# EAGLE board main_board2 (EAGLE 9.2.2)
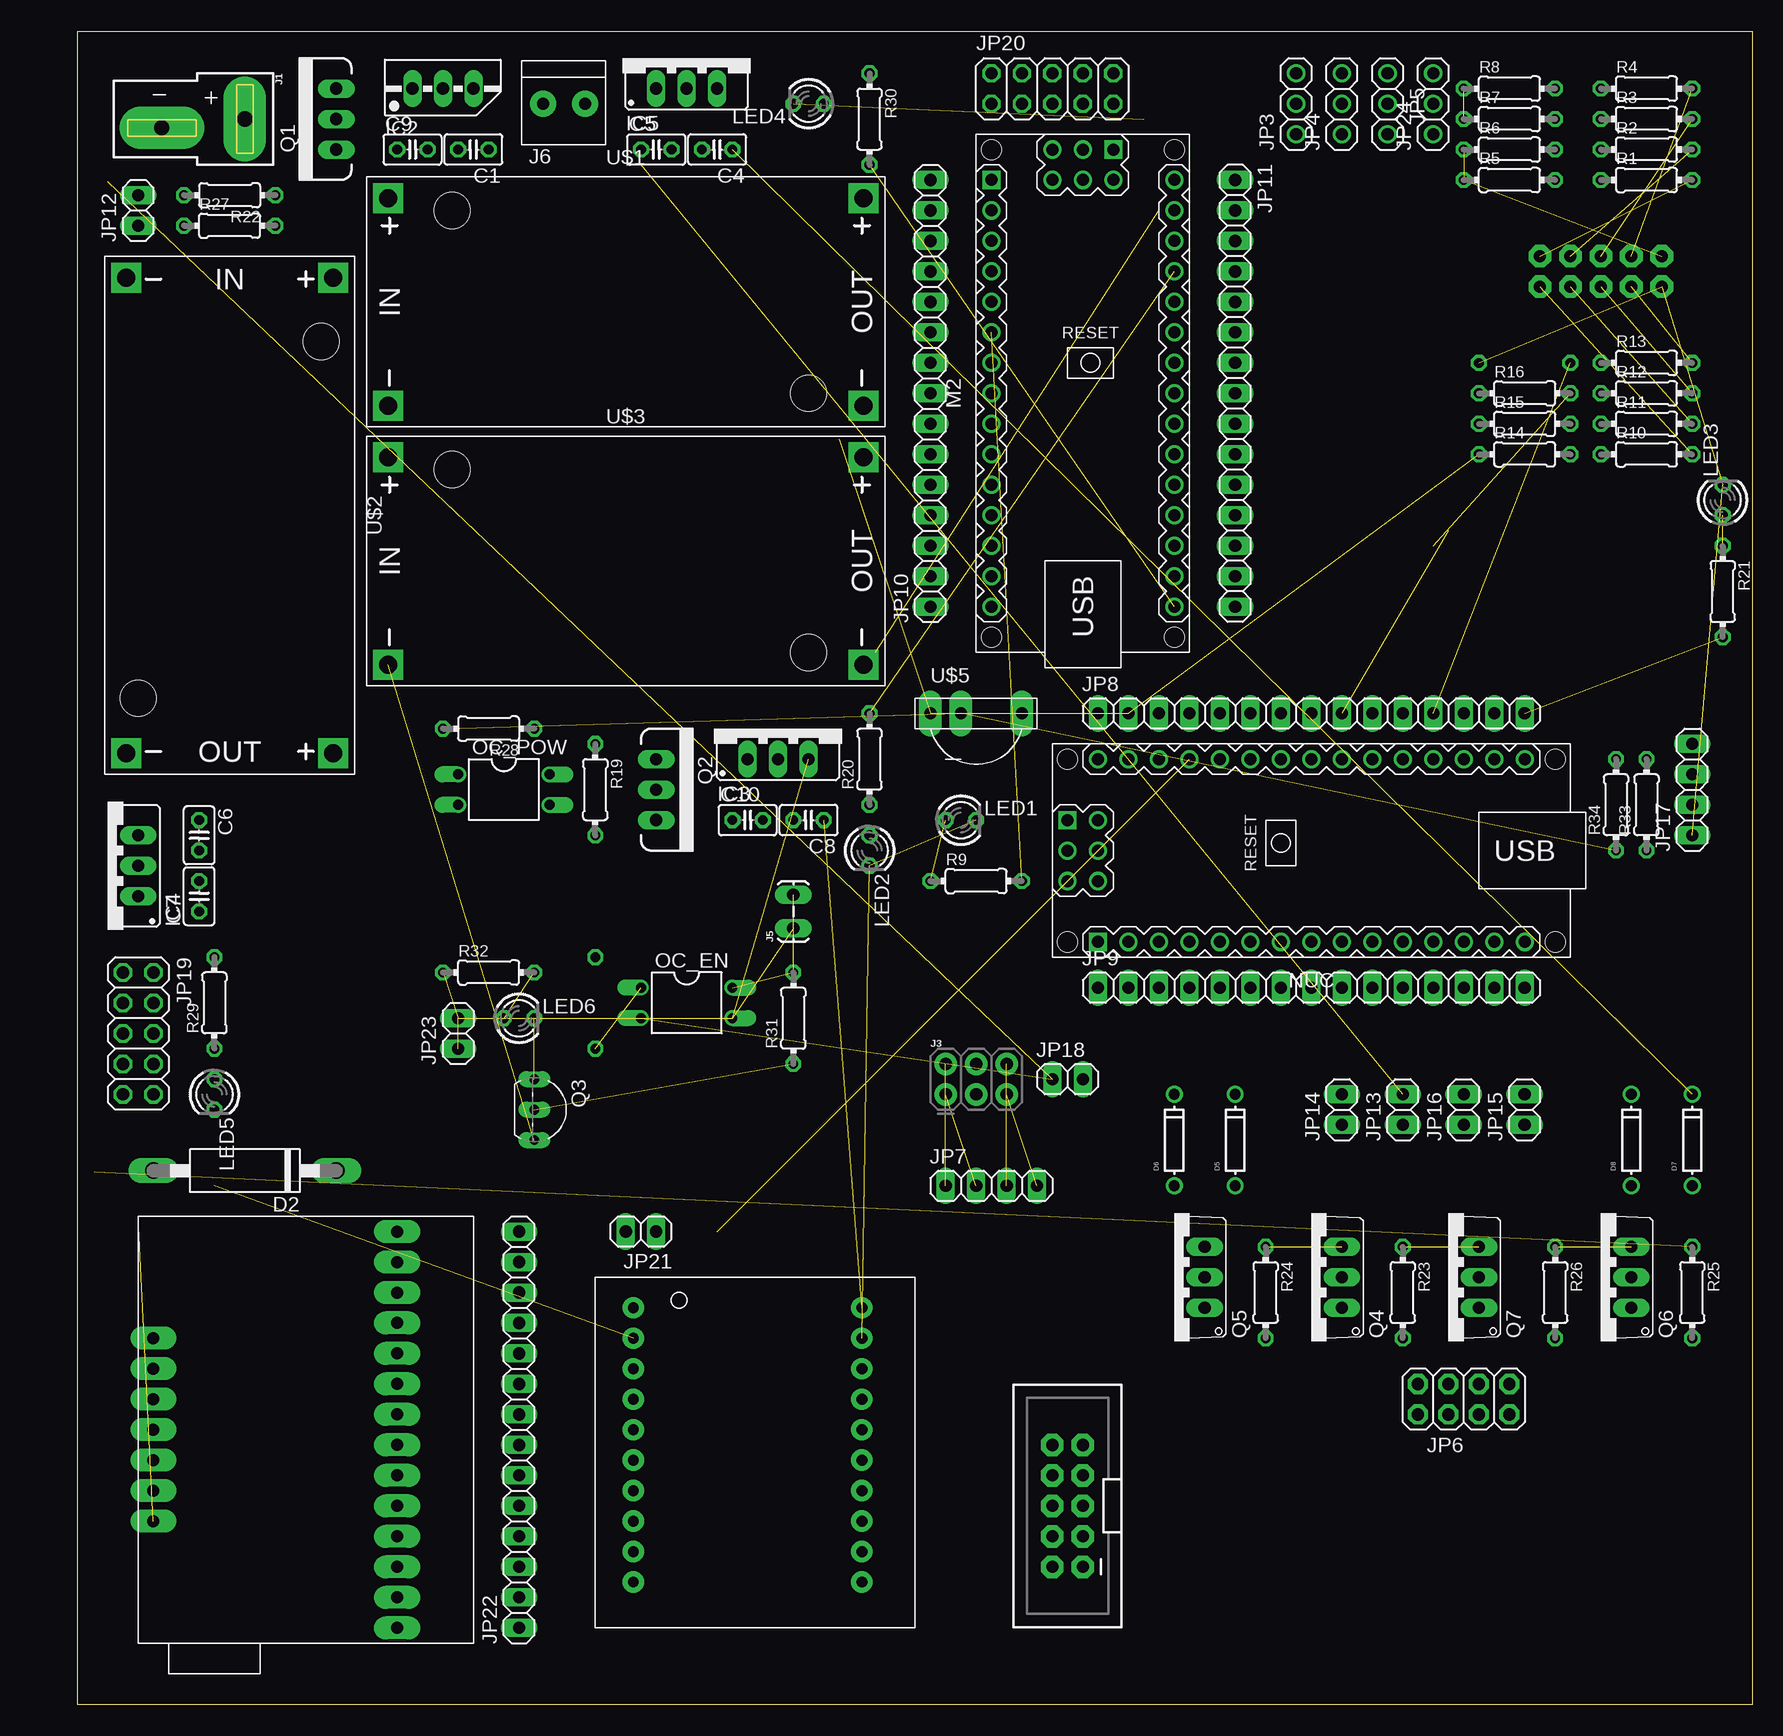
[diagram p0: board, top side]
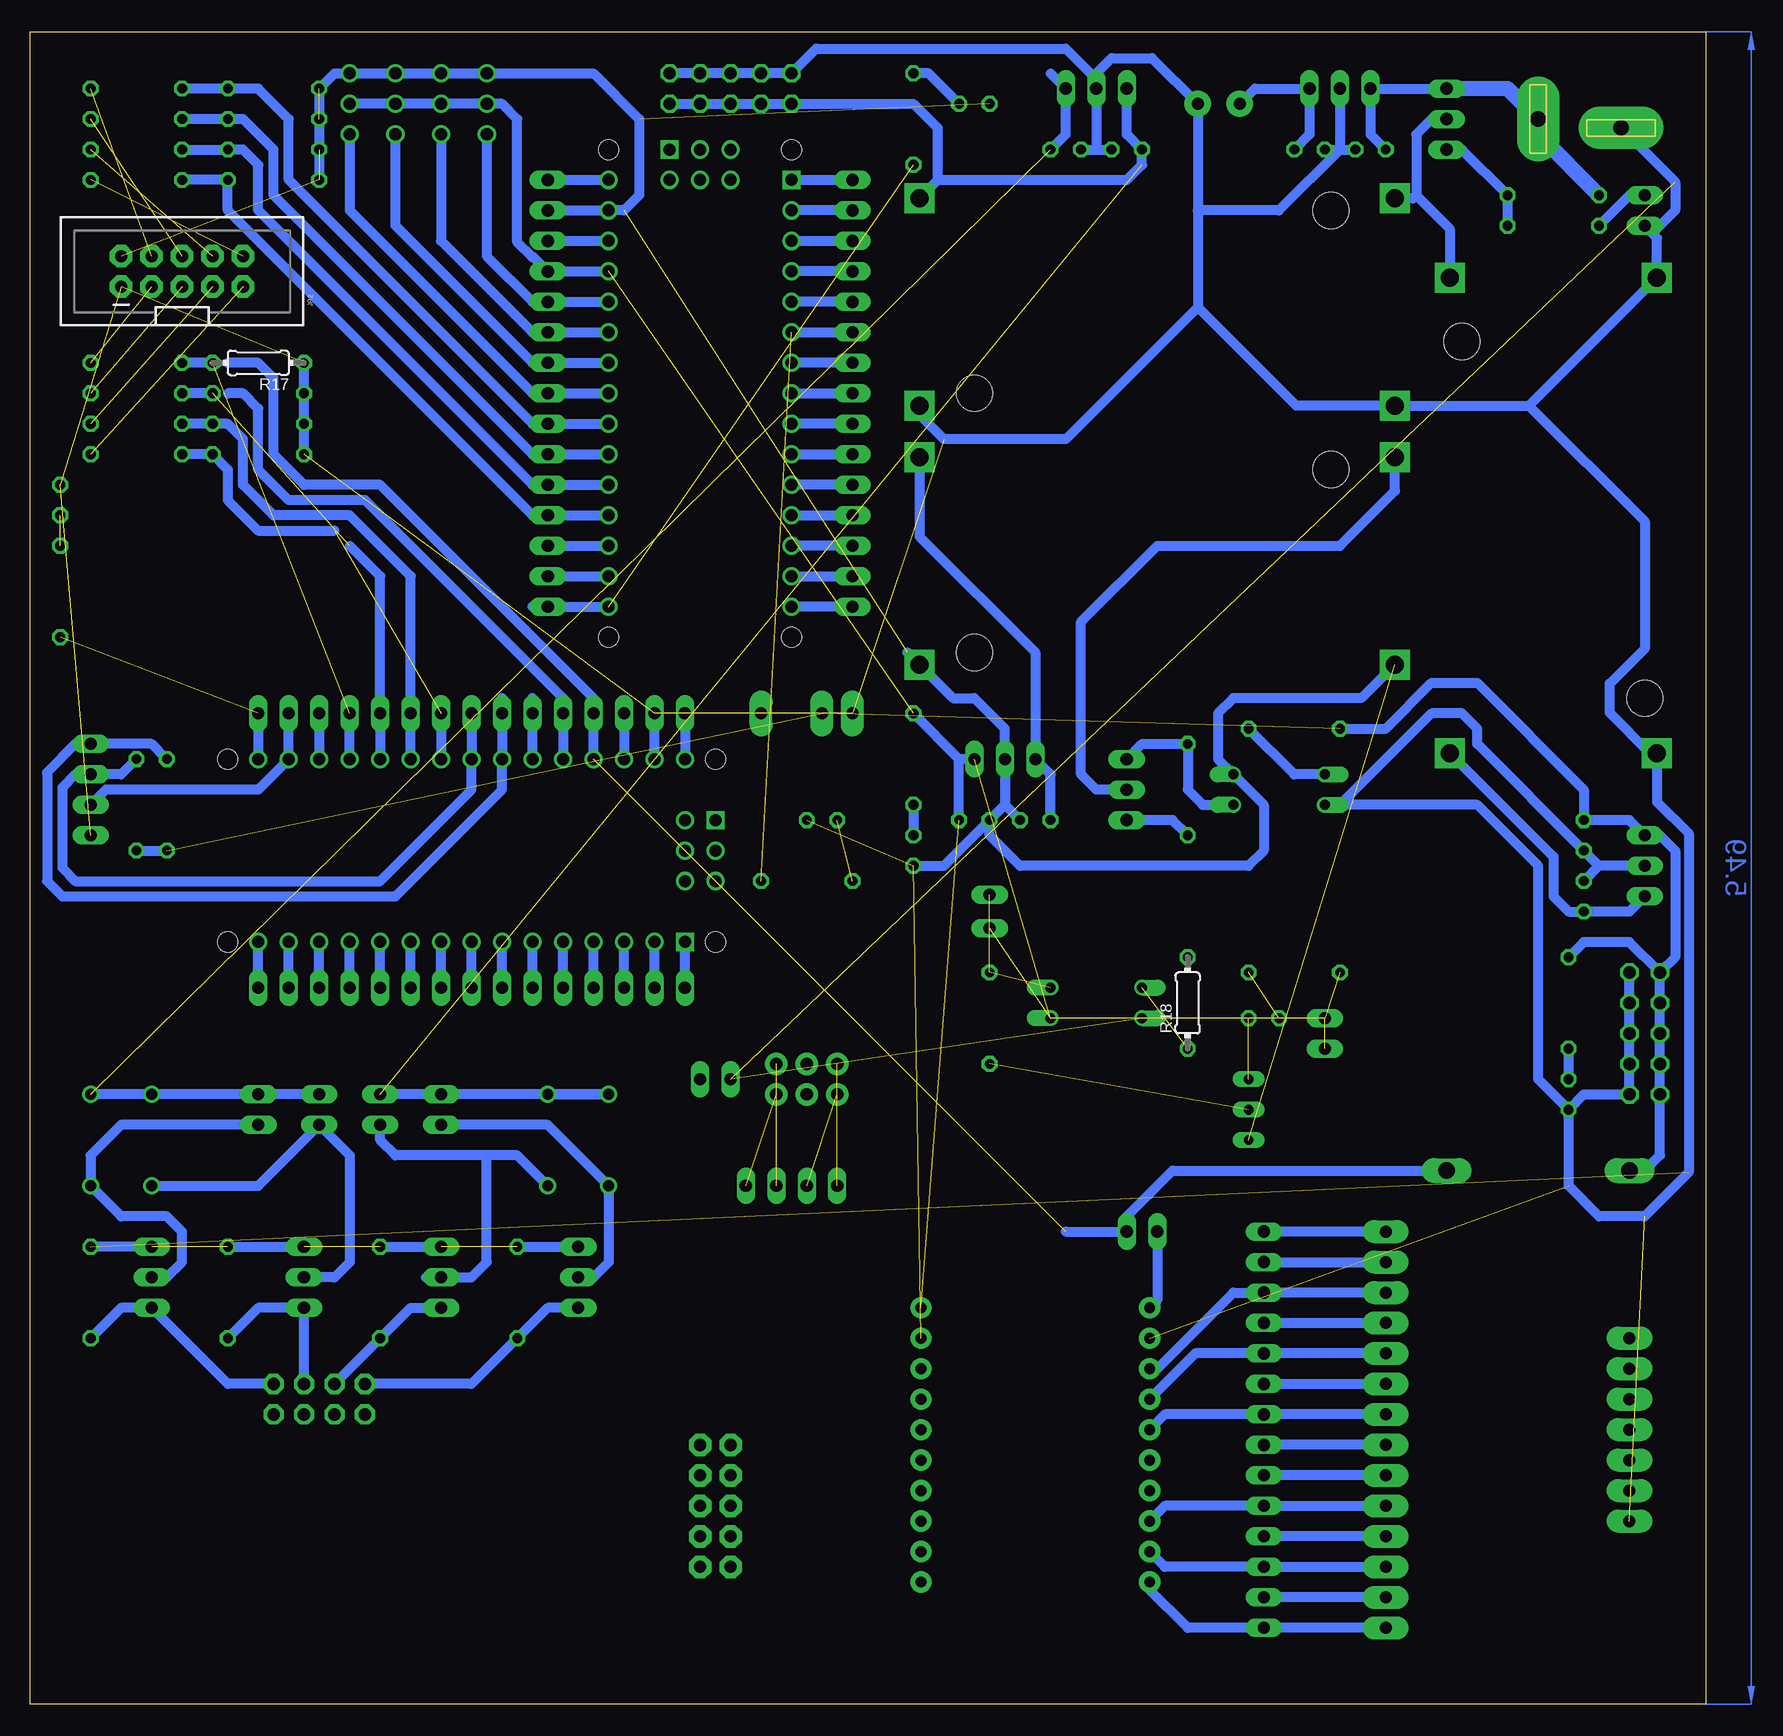
[diagram p1: board, bottom side, seen from below]

Size 139.68 x 139.37 mm. Coordinates in mm from the lower left corner, seen from the top.
Outline: 0,0 139.68,0 139.68,139.37 0,139.37 0,0
Copper layers (1*16): Top 0.035mm / dielectric 1.5mm / Bottom 0.035mm
Design rules "default": minimum track width 6mil, minimum drill 0.35mm, track to track 6mil, track to pad 6mil, pad to pad 6mil, via to via 6mil, smd to smd 6mil, copper to edge 40mil, drill to drill 6mil, minimum pad ring 10mil, minimum via ring 8mil, stop-mask expansion 4mil, vias tented up to drill 0mil, thermal gap 10mil

## Footprints (pad centres in the part's own frame; a part is rotated, then mirrored left to right if it is on the bottom)
C025-025X050 = drill 0.813 octagon: 1 -1.27,0; 2 1.27,0
CB417-15 = drill 1.397 long: A 7.62,0; C -7.62,0
DO-1N4148 = drill 0.9: A -3.81,0; C 3.81,0
78MXXS = drill 1.016 long: GND 0,-2.54; IN -2.54,-2.54; OUT 2.54,-2.54
78XXS = drill 1.016 long: GND 0,-2.54; IN -2.54,-2.54; OUT 2.54,-2.54
DEANS = drill 1.27 pad 3.556 long: + 0,0; - 0.737,-6.921
2X3-NS = drill 1.016 pad 1.88: 1 -2.54,-1.27; 2 -2.54,1.27; 3 0,-1.27; 4 0,1.27; 5 2.54,-1.27; 6 2.54,1.27
1X02_LOCK_LONGPADS = drill 1.016 long: 1 -0.127,0; 2 2.667,0
1X2-3.5MM = drill 1 pad 2.184: 1 1.8,0; 2 -1.7,0
2X5-SHROUDED = drill 1.016 pad 1.88 octagon: 1 -1.27,5.08; 2 1.27,5.08; 3 -1.27,2.54; 4 1.27,2.54; 5 -1.27,0; 6 1.27,0; 7 -1.27,-2.54; 8 1.27,-2.54; 9 -1.27,-5.08; 10 1.27,-5.08
1X03 = drill 1.016: 1 -2.54,0; 2 0,0; 3 2.54,0
2X04 = drill 1.016 pad 1.676 octagon: 1 -3.81,-1.27; 2 -3.81,1.27; 3 -1.27,-1.27; 4 -1.27,1.27; 5 1.27,-1.27; 6 1.27,1.27; 7 3.81,-1.27; 8 3.81,1.27
1X04 = drill 1.016 long: 1 -3.81,0; 2 -1.27,0; 3 1.27,0; 4 3.81,0
1X15 = drill 1.016 long: 1 -17.78,0; 2 -15.24,0; 3 -12.7,0; 4 -10.16,0; 5 -7.62,0; 6 -5.08,0; 7 -2.54,0; 8 0,0; 9 2.54,0; 10 5.08,0; 11 7.62,0; 12 10.16,0; 13 12.7,0; 14 15.24,0; 15 17.78,0
1X02 = drill 1.016 long: 1 -1.27,0; 2 1.27,0
2X05 = drill 1.016 octagon: 1 -5.08,-1.27; 2 -5.08,1.27; 3 -2.54,-1.27; 4 -2.54,1.27; 5 0,-1.27; 6 0,1.27; 7 2.54,-1.27; 8 2.54,1.27; 9 5.08,-1.27; 10 5.08,1.27
1X14 = drill 1.016 long: 1 -16.51,0; 2 -13.97,0; 3 -11.43,0; 4 -8.89,0; 5 -6.35,0; 6 -3.81,0; 7 -1.27,0; 8 1.27,0; 9 3.81,0; 10 6.35,0; 11 8.89,0; 12 11.43,0; 13 13.97,0; 14 16.51,0
LED3MM = drill 0.813 octagon: A -1.27,0; K 1.27,0
ARDUINO-NANO-3.0#ISP = drill 1 square: J1.1 17.78,7.62; J4.1 20.32,-2.54 | drill 1: J1.2 15.24,7.62; J1.3 12.7,7.62; J1.4 10.16,7.62; J1.5 7.62,7.62; J1.6 5.08,7.62; J1.7 2.54,7.62; J1.8 0,7.62; J1.9 -2.54,7.62; J1.10 -5.08,7.62; J1.11 -7.62,7.62; J1.12 -10.16,7.62; J1.13 -12.7,7.62; J1.14 -15.24,7.62; J1.15 -17.78,7.62; J2.1 17.78,-7.62; J2.2 15.24,-7.62; J2.3 12.7,-7.62; J2.4 10.16,-7.62; J2.5 7.62,-7.62; J2.6 5.08,-7.62; J2.7 2.54,-7.62; J2.8 0,-7.62; J2.9 -2.54,-7.62; J2.10 -5.08,-7.62; J2.11 -7.62,-7.62; J2.12 -10.16,-7.62; J2.13 -12.7,-7.62; J2.14 -15.24,-7.62; J2.15 -17.78,-7.62; J4.2 17.78,-2.54; J4.3 20.32,0; J4.4 17.78,0; J4.5 20.32,2.54; J4.6 17.78,2.54 | hole 1.651: -20.32,7.62; -20.32,-7.62; 20.32,-7.62; 20.32,7.62
DIL04 = drill 0.813 offset: 1 -1.27,-3.81; 2 1.27,-3.81; 3 1.27,3.81; 4 -1.27,3.81
TO220V = drill 1.016 long: 1 -2.54,0; 2 0,0; 3 2.54,0
TO92-EBC = drill 0.813 long: B 0,-1.27; C -2.54,-1.27; E 2.54,-1.27
TO220V' = drill 1.016 long: 1 -2.54,-2.54; 2 0,-2.54; 3 2.54,-2.54
0204/7 = drill 0.813 octagon: 1 -3.81,0; 2 3.81,0
DC-DC-STEP-DOWN-LM2596 = drill 1.5 pad 2.5 square: IN+ -19.812,8.636; IN- -19.812,-8.636; OUT+ 19.812,8.636; OUT- 19.812,-8.636 | hole 3: -14.478,7.62; 15.24,-7.62
TSOP3XXX = drill 1 pad 1.93 long: 1 -2.54,0; 2 0,0; 3 5.08,0
SERVO_CONTROLLER = drill 1 pad 1.93 long: 0 6.35,34.29; 1 6.35,31.75; 2 6.35,29.21; 3 6.35,26.67; 4 6.35,24.13; 5 6.35,21.59; 6 6.35,16.51; 7 6.35,13.97; 8 6.35,11.43; 9 6.35,8.89; 10 6.35,6.35; 11 6.35,3.81; +5V(OUT) 6.35,19.05; ERR 26.67,12.7; GND 26.67,25.4; RST' 26.67,15.24; RX 26.67,20.32; TX 26.67,17.78; TXIN 26.67,10.16; VIN 26.67,22.86; VSRV 6.35,1.27
DIGITAL_ISOLATOR_MODULE = drill 0.9 pad 1.778: 1 3.175,26.67; 2 3.175,24.13; 3 3.175,21.59; 4 3.175,19.05; 5 3.175,16.51; 6 3.175,13.97; 7 3.175,11.43; 8 3.175,8.89; 9 3.175,6.35; 10 3.175,3.81; 11 22.225,3.81; 12 22.225,6.35; 13 22.225,8.89; 14 22.225,11.43; 15 22.225,13.97; 16 22.225,16.51; 17 22.225,19.05; 18 22.225,21.59; 19 22.225,24.13; 20 22.225,26.67

## Placement (x,y rotation side)
C1  [C025-025X050]  33.02,129.54 180 top
C4  [C025-025X050]  53.34,129.54 180 top
C5  [C025-025X050]  48.26,129.54 0 top
C6  [C025-025X050]  10.16,72.39 270 top
C7  [C025-025X050]  10.16,67.31 90 top
C8  [C025-025X050]  60.96,73.66 180 top
C9  [C025-025X050]  27.94,129.54 0 top
C10  [C025-025X050]  55.88,73.66 0 top
D2  SCOTTKY  [CB417-15]  13.97,44.45 180 top
D5  [DO-1N4148]  96.52,46.99 90 top
D6  [DO-1N4148]  91.44,46.99 90 top
D7  [DO-1N4148]  134.62,46.99 90 top
D8  [DO-1N4148]  129.54,46.99 90 top
IC2  7812  [78MXXS]  30.48,137.16 0 top
IC3  [78XXS]  58.42,81.28 0 top
IC4  [78XXS]  2.54,69.85 90 top
IC5  [78XXS]  50.8,137.16 0 top
J1  [DEANS]  13.97,132.08 270 top
J3  [2X3-NS]  74.93,52.07 0 top
J5  [1X02_LOCK_LONGPADS]  59.69,64.77 90 top
J6  1X2-3.5MM  [1X2-3.5MM]  40.64,133.35 180 top
JP1  M05X2SHD  [2X5-SHROUDED]  82.55,16.51 180 top
JP2  M05X2SHD  [2X5-SHROUDED]  127,119.38 90 bottom
JP3  [1X03]  101.6,133.35 90 top
JP4  [1X03]  105.41,133.35 90 top
JP5  Temp Sensor  [1X03]  109.22,133.35 90 top
JP6  [2X04]  115.57,25.4 180 top
JP7  [1X04]  76.2,43.18 0 top
JP8  [1X15]  102.87,82.55 0 top
JP9  [1X15]  102.87,59.69 0 top
JP10  [1X15]  71.12,109.22 90 top
JP11  [1X15]  96.52,109.22 270 top
JP12  [1X02]  5.08,124.46 90 top
JP13  [1X02]  110.49,49.53 90 top
JP14  [1X02]  105.41,49.53 90 top
JP15  [1X02]  120.65,49.53 90 top
JP16  [1X02]  115.57,49.53 90 top
JP17  [1X04]  134.62,76.2 90 top
JP18  Extra Reed  [1X02]  82.55,52.07 0 top
JP19  [2X05]  5.08,55.88 270 top
JP20  [2X05]  81.28,134.62 0 top
JP21  [1X02]  46.99,39.37 180 top
JP22  [1X14]  36.83,22.86 90 top
JP23  [1X02]  31.75,55.88 90 top
JP24  [1X03]  113.03,133.35 90 top
LED1  LED3MM  [LED3MM]  73.66,73.66 0 top
LED2  LED3MM  [LED3MM]  66.04,71.12 270 top
LED3  LED3MM  [LED3MM]  137.16,100.33 90 top
LED4  LED3MM  [LED3MM]  60.96,133.35 180 top
LED5  LED3MM  [LED3MM]  11.43,50.8 270 top
LED6  LED3MM  [LED3MM]  36.83,57.15 0 top
M2  ARDUINO-NANO-3.0#ISP  [ARDUINO-NANO-3.0#ISP]  83.82,109.22 90 top
NUC  [ARDUINO-NANO-3.0#ISP]  102.87,71.12 180 top
OC_EN  SFH610  [DIL04]  50.8,58.42 270 top
OC_POW  SFH610  [DIL04]  35.56,76.2 270 top
Q1  MOSFET-PCHANNELFQP27P06  [TO220V]  21.59,132.08 90 top
Q2  MOSFET-PCHANNELFQP27P06  [TO220V]  48.26,76.2 270 top
Q3  BC548  [TO92-EBC]  39.37,49.53 270 top
Q4  [TO220V']  102.87,35.56 90 top
Q5  [TO220V']  91.44,35.56 90 top
Q6  [TO220V']  127,35.56 90 top
Q7  [TO220V']  114.3,35.56 90 top
R1  [0204/7]  130.81,127 0 top
R2  [0204/7]  130.81,129.54 0 top
R3  [0204/7]  130.81,132.08 0 top
R4  [0204/7]  130.81,134.62 0 top
R5  [0204/7]  119.38,127 0 top
R6  [0204/7]  119.38,129.54 0 top
R7  [0204/7]  119.38,132.08 0 top
R8  [0204/7]  119.38,134.62 0 top
R9  [0204/7]  74.93,68.58 0 top
R10  [0204/7]  130.81,104.14 0 top
R11  [0204/7]  130.81,106.68 0 top
R12  [0204/7]  130.81,109.22 0 top
R13  [0204/7]  130.81,111.76 0 top
R14  [0204/7]  120.65,104.14 0 top
R15  [0204/7]  120.65,106.68 0 top
R16  [0204/7]  120.65,109.22 0 top
R17  [0204/7]  120.65,111.76 180 bottom
R18  [0204/7]  43.18,58.42 90 bottom
R19  [0204/7]  43.18,76.2 270 top
R20  [0204/7]  66.04,78.74 90 top
R21  [0204/7]  137.16,92.71 270 top
R22  [0204/7]  12.7,125.73 180 top
R23  [0204/7]  110.49,34.29 270 top
R24  [0204/7]  99.06,34.29 270 top
R25  [0204/7]  134.62,34.29 270 top
R26  [0204/7]  123.19,34.29 270 top
R27  [0204/7]  12.7,123.19 0 top
R28  [0204/7]  34.29,81.28 180 top
R29  [0204/7]  11.43,58.42 90 top
R30  [0204/7]  66.04,132.08 270 top
R31  [0204/7]  59.69,57.15 90 top
R32  [0204/7]  34.29,60.96 0 top
R33  [0204/7]  130.81,74.93 90 top
R34  [0204/7]  128.27,74.93 90 top
U$1  DC-DC-STEP-DOWN-LM2596  [DC-DC-STEP-DOWN-LM2596]  45.72,116.84 0 top
U$2  DC-DC-STEP-DOWN-LM2596  [DC-DC-STEP-DOWN-LM2596]  12.7,99.06 270 top
U$3  DC-DC-STEP-DOWN-LM2596  [DC-DC-STEP-DOWN-LM2596]  45.72,95.25 0 top
U$5  TSOP34X  [TSOP3XXX]  73.66,82.55 0 top
U$6  SERVO_CONTROLLER  [SERVO_CONTROLLER]  33.02,40.64 180 top
U$7  DIGITAL_ISOLATOR  [DIGITAL_ISOLATOR_MODULE]  43.18,6.35 0 top

## Library data of the parts
C1 C4-C10 = rcl; SPICEPREFIX: C
D2 D5-D8 J6 JP3-JP6 JP8-JP11 JP24 Q4-Q7 = adafruit
IC2-IC5 = v-reg
J1 = SparkFun-Connectors; SF_ID: PRT-11864
J3 J5 JP1 JP2 = SparkFun-Connectors
JP7 JP12-JP23 = pinhead
LED1-LED6 U$5 = CEDT_JANUARY_2015_v5
M2 NUC U$1-U$3 = diy-modules
OC_EN OC_POW = optocoupler; MF: VISHAY/TELEFUNKEN; MPN: SFH6106-4; OC_FARNELL: 1469568; OC_NEWARK: 58K2193
Q1 Q2 = SparkFun-DiscreteSemi
Q3 = transistor-npn
R1-R34 = rcl; SPICEPREFIX: R
U$6 = Servo Controller
U$7 = ISO7330C DIGITAL ISOLATOR MODULE

## Nets
DR1: JP6.1 Q6.1 R25.2
DR1_IN: JP6.2
DR2: JP6.3 Q7.1 R26.2
DR2_IN: JP6.4
E16.8V: Q2.3 R19.2
EA0: JP11.12 M2.J2.12 R1.1 R5.2
EA1: JP11.11 M2.J2.11 R2.1 R6.2
EA2: JP11.10 M2.J2.10 R3.1 R7.2
EA3: JP11.9 M2.J2.9 R4.1 R8.2
ED3: JP10.10 M2.J1.6 R9.2
EN: J5.2 OC_EN.4 R31.2
ENLED: R18.2
GNDE: C8.2 C10.2 IC3.GND JP2.2 JP3.3 JP4.3 JP5.3 JP11.2 JP24.3 LED1.K LED2.K LED4.K M2.J2.2 OC_POW.4 Q3.E R5.1 R6.1 R7.1 R8.1 U$3.IN- U$3.OUT- U$7.19
GNDN: C1.2 C4.2 C5.2 C6.2 C7.2 C9.2 IC2.GND IC4.GND IC5.GND J1.- J6.2 JP2.1 JP8.2 JP12.1 JP17.1 JP18.1 JP19.2 JP19.4 JP19.6 JP19.8 JP19.10 JP20.2 JP20.4 JP20.6 JP20.8 JP20.10 LED3.K LED5.K NUC.J2.2 OC_EN.2 OC_POW.2 Q4.3 Q5.3 Q6.3 Q7.3 R14.1 R15.1 R16.1 R17.1 R23.1 R24.1 R25.1 R26.1 U$1.IN- U$1.OUT- U$2.IN- U$2.OUT- U$5.1 U$6.GND U$7.2
GR1_IN: J3.3
GR2_IN: J3.4
N6V: C4.1 D7.C D8.C IC5.OUT JP15.2 JP16.2
N12V: C5.1 D5.C D6.C IC5.IN JP13.2 JP14.2 JP20.1 JP20.3 JP20.5 JP20.7 JP20.9 U$1.OUT+
N$1: JP10.11 M2.J1.5
N$2: OC_EN.1 R18.1
N$4: JP9.1 NUC.J1.1
N$5: JP9.2 NUC.J1.2
N$6: JP9.3 NUC.J1.3
N$7: LED1.A R9.1
N$8: JP2.10 R1.2
N$9: JP2.8 R2.2
N$10: JP2.6 R3.2
N$11: JP2.4 R4.2
N$12: JP8.7 JP17.4 NUC.J2.7 R34.2
N$13: JP8.8 JP17.3 NUC.J2.8 R33.2
N$14: JP9.4 NUC.J1.4
N$15: JP9.5 NUC.J1.5
N$16: JP2.9 R10.2
N$17: JP2.7 R11.2
N$18: JP2.5 R12.2
N$19: JP2.3 R13.2
N$20: JP9.6 NUC.J1.6
N$21: OC_POW.3 Q2.1 R19.1
N$22: JP9.7 NUC.J1.7
N$23: C10.1 IC3.IN U$3.OUT+
N$24: JP22.10 U$6.8 U$7.4
N$25: Q2.2 U$3.IN+
N$26: LED2.A R20.1
N$28: D2.C JP8.4 JP21.1 NUC.J2.4
N$31: Q3.B R31.1
N$34: JP9.8 NUC.J1.8
N$35: JP22.1 U$6.0 U$7.10
N$36: C9.1 IC2.IN J1.+ Q1.3 R22.2
N$37: C1.1 IC2.OUT J6.1
N$38: JP22.2 U$6.1
N$39: JP9.9 NUC.J1.9
N$40: JP9.10 NUC.J1.10
N$41: LED4.A R30.1
N$42: JP11.1 M2.J2.1
N$43: JP9.11 NUC.J1.11
N$44: JP9.12 NUC.J1.12
N$45: JP9.13 NUC.J1.13
N$46: JP9.14 NUC.J1.14
N$48: JP9.15 NUC.J1.15
N$49: JP22.3 U$6.2 U$7.9
N$50: J3.6 JP7.3
N$51: J3.2 JP7.1
N$52: J3.1 JP7.2
N$53: J3.5 JP7.4
N$54: JP8.1 NUC.J2.1
N$56: JP8.3 NUC.J2.3
N$57: JP21.2 U$7.1
N$58: JP8.5 NUC.J2.5
N$59: JP8.6 NUC.J2.6
N$60: JP22.4 U$6.3
N$61: JP22.5 U$6.4 U$7.8
N$62: JP8.13 NUC.J2.13
N$63: JP8.14 JP17.2 NUC.J2.14
N$64: JP8.15 NUC.J2.15 R21.2
N$65: LED3.A R21.1
N$66: JP22.6 U$6.5
N$67: JP22.7 U$6.+5V(OUT)
N$68: JP22.8 U$6.6 U$7.5
N$69: JP22.9 U$6.7
N$70: Q1.1 R22.1 R27.2
N$72: JP22.11 U$6.9
N$73: JP22.12 U$6.10 U$7.3
N$74: JP22.13 U$6.11
N$75: JP10.1 M2.J1.15
N$76: JP10.2 M2.J1.14
N$77: JP10.3 M2.J1.13
N$78: JP10.4 M2.J1.12
N$79: JP10.5 M2.J1.11
N$80: JP10.6 M2.J1.10
N$81: JP10.7 M2.J1.9
N$82: JP10.8 M2.J1.8
N$83: JP10.9 M2.J1.7
N$84: JP22.14 U$6.VSRV
N$85: JP10.12 M2.J1.4
N$86: JP10.13 M2.J1.3
N$87: JP10.14 M2.J1.2
N$88: JP10.15 M2.J1.1
N$89: JP11.15 M2.J2.15 R30.2
N$90: JP11.14 M2.J2.14
N$91: JP11.13 M2.J2.13
N$93: JP11.3 M2.J2.3
N$95: D5.A JP13.1 Q4.2
N$96: D6.A JP14.1 Q5.2
N$97: JP12.2 R27.1
N$98: D7.A JP15.1 Q6.2
N$99: D8.A JP16.1 Q7.2
N$100: C7.1 IC4.IN U$2.OUT+
N$101: OC_POW.1 R28.1
N$102: Q1.2 U$1.IN+ U$2.IN+
N$104: LED5.A R29.1
N$106: LED6.K Q3.C
N$107: LED6.A R32.2
NA0: JP8.12 NUC.J2.12 R13.1 R17.2
NA1: JP8.11 NUC.J2.11 R12.1 R16.2
NA2: JP8.10 NUC.J2.10 R11.1 R15.2
NA3: JP8.9 NUC.J2.9 R10.1 R14.2
NTSOP: U$5.3
TMP1: JP11.8 JP24.1 M2.J2.8
TMP2: JP5.1 JP11.7 M2.J2.7
TMP3: JP4.1 JP11.6 M2.J2.6
TMP4: JP3.1 JP11.5 M2.J2.5
TP1: JP6.5 Q4.1 R23.2
TP1_IN: JP6.6
TP2: JP6.7 Q5.1 R24.2
TP2_IN: JP6.8
VCCE: C8.1 IC3.OUT J5.1 JP3.2 JP4.2 JP5.2 JP11.4 JP23.1 JP23.2 JP24.2 M2.J2.4 OC_EN.3 R20.2 R32.1 U$7.20
VCCN: C6.1 D2.A IC4.OUT JP19.1 JP19.3 JP19.5 JP19.7 JP19.9 R28.2 R29.2 R33.1 R34.1 U$5.2

## Tracks (layer width: path | path; a pad name or v marks a point on that pad's centre or on a via)
DR1
  Bottom 0.813: JP6.1 123.19,26.67 Q6.1 132.08,33.02 R25.2
DR2
  Bottom 0.813: JP6.3 Q7.1 120.65,33.02 R26.2
E16.8V
  Bottom 0.813: R19.2 44.45,73.66 Q2.3
EA0
  Bottom 0.813: M2.J2.12 JP11.12 97.79,99.06 123.19,124.46 R5.2 R1.1
EA1
  Bottom 0.813: M2.J2.11 JP11.11 97.79,101.6 120.65,124.46 120.65,128.27 121.92,129.54 R6.2 R2.1
EA2
  Bottom 0.813: M2.J2.10 JP11.10 97.79,104.14 119.38,125.73 119.38,129.54 121.92,132.08 R7.2 R3.1
EA3
  Bottom 0.813: M2.J2.9 JP11.9 97.79,106.68 118.11,127 118.11,132.08 120.65,134.62 R8.2 R4.1
ED3  (1 unrouted)
  Bottom 0.813: M2.J1.6 JP10.10
EN  (2 unrouted)
GNDE  (8 unrouted)
  Bottom 0.813: 58.42,74.93 IC3.GND 58.42,81.28 60.96,83.82 62.74,83.82 U$3.OUT- 66.55,87.63 | 58.42,74.93 C10.2 | 58.42,74.93 C8.2 | LED2.K 63.5,69.85 C8.2 | R5.1 R8.1 114.3,135.89 JP24.3 JP5.3 JP4.3 JP3.3 92.71,135.89 88.9,132.08 88.9,125.73 90.17,124.46 M2.J2.2 JP11.2 | C8.2 59.69,72.39 57.15,69.85 38.1,69.85 36.83,71.12 36.83,74.93 OC_POW.4 40.64,78.74 40.64,82.55 39.37,83.82 28.7,83.82 U$3.IN-
GNDN  (14 unrouted)
  Bottom 0.813: R24.1 Q5.3 | R23.1 Q4.3 | R26.1 Q7.3 | Q6.3 R25.1 | IC5.GND 50.8,135.89 49.53,137.16 46.15,137.16 J6.2 42.34,124.46 | C4.2 50.8,129.54 | 50.8,129.54 C5.2 | IC5.GND 50.8,129.54 | 42.34,124.46 42.34,116.41 | U$1.OUT- 65.53,107.44 63.5,105.41 53.34,105.41 42.34,116.41 | C1.2 30.48,129.54 | 30.48,129.54 C9.2 | IC2.GND 30.48,129.54 | 30.48,129.54 35.56,124.46 42.34,124.46 | 42.34,116.41 34.13,108.2 U$1.IN- 14.73,108.2 | 14.73,108.2 U$2.IN- 4.06,122.17 JP12.1 3.81,123.19 2.54,124.46 2.54,126.84 J1.- | 14.73,108.2 5.08,98.55 5.08,87.95 8,85.03 8,82.61 4.64,79.25 U$2.OUT- 4.06,75.18 1.42,72.54 1.42,44.3 5.08,40.64 8.89,40.64 11.43,43.18 LED5.K | IC4.GND 8.89,69.85 | 8.89,69.85 C7.2 | 8.89,69.85 C6.2 19.05,80.01 19.05,81.28 20.32,82.55 22.86,82.55 30.48,74.93 | OC_POW.2 30.48,74.93 | IC5.GND 50.8,135.41 53.34,137.95 74.14,137.95 JP20.2 JP20.4 JP20.6 JP20.8 JP20.10 | JP19.2 JP19.4 JP19.6 JP19.8 JP19.10 10.16,50.8 LED5.K | LED5.K 13.97,52.07 13.97,69.85 19.05,74.93 30.48,74.93 | R14.1 R15.1 R16.1 R17.1 | NUC.J2.2 JP8.2
N6V  (1 unrouted)
  Bottom 0.813: C4.1 53.34,130.81 IC5.OUT 54.61,135.89 | D8.C D7.C JP15.2 JP16.2
N12V  (1 unrouted)
  Bottom 0.813: IC5.IN 48.26,130.81 C5.1 46.99,128.27 48.26,127 64.01,127 | 64.01,127 U$1.OUT+ | JP13.2 JP14.2 D6.C D5.C | 64.01,127 64.01,131.32 66.04,133.35 JP20.1 JP20.3 JP20.5 JP20.7 JP20.9
N$1
  Bottom 0.813: JP10.11 M2.J1.5
N$2  (1 unrouted)
N$4
  Bottom 0.813: JP9.1 NUC.J1.1
N$5
  Bottom 0.813: JP9.2 NUC.J1.2
N$6
  Bottom 0.813: JP9.3 NUC.J1.3
N$7  (1 unrouted)
N$8  (1 unrouted)
N$9  (1 unrouted)
N$10  (1 unrouted)
N$11  (1 unrouted)
N$12
  Bottom 0.813: 100.33,83.82 JP8.7 NUC.J2.7 100.33,76.2 109.22,67.31 136.99,67.31 138.26,68.58 138.26,77.64 135.89,80.01 JP17.4 129.54,80.01 R34.2
N$13
  Bottom 0.813: JP8.8 NUC.J2.8 102.87,76.2 110.49,68.58 135.89,68.58 136.99,69.68 136.99,76.37 135.89,77.47 JP17.3 132.08,77.47 R33.2
N$14
  Bottom 0.813: JP9.4 NUC.J1.4
N$15
  Bottom 0.813: JP9.5 NUC.J1.5
N$16  (1 unrouted)
N$17  (1 unrouted)
N$18  (1 unrouted)
N$19  (1 unrouted)
N$20
  Bottom 0.813: JP9.6 NUC.J1.6
N$21
  Bottom 0.813: Q2.1 46.99,80.01 R19.1 43.18,76.2 41.91,74.93 OC_POW.3
N$22
  Bottom 0.813: JP9.7 NUC.J1.7
N$23
  Bottom 0.813: C10.1 54.61,77.47 IC3.IN 55.88,87.63 65.53,97.28 U$3.OUT+
N$24
  Bottom 0.813: U$6.8 JP22.10 42.55,29.21 U$7.4
N$25
  Bottom 0.813: Q2.2 50.8,76.2 52.07,77.47 52.07,90.17 45.72,96.52 30.48,96.52 25.91,101.09 U$3.IN+
N$26
  Bottom 0.813: R20.1 LED2.A
N$28  (1 unrouted)
  Bottom 0.813: 53.34,39.37 JP21.1 48.26,40.64 44.45,44.45 D2.C | NUC.J2.4 JP8.4 92.71,83.82 110.49,101.6 116.84,101.6 119.38,104.14 119.38,110.49 120.65,111.76 123.19,111.76
N$31  (1 unrouted)
N$34
  Bottom 0.813: JP9.8 NUC.J1.8
N$35
  Bottom 0.813: U$6.0 JP22.1 43.18,6.35 46.35,9.53 U$7.10
N$36
  Bottom 0.813: C9.1 27.94,130.81 IC2.IN Q1.3
  Bottom 1.27: Q1.3 16.51,134.62 J1.+ 13.97,130.81 R22.2
N$37
  Bottom 0.813: C1.1 33.02,130.81 IC2.OUT 37.57,134.62 J6.1
N$38
  Bottom 0.813: U$6.1 JP22.2
N$39
  Bottom 0.813: JP9.9 NUC.J1.9
N$40
  Bottom 0.813: JP9.10 NUC.J1.10
N$41
  Bottom 0.813: LED4.A 64.77,135.89 R30.1
N$42
  Bottom 0.813: JP11.1 M2.J2.1
N$43
  Bottom 0.813: JP9.11 NUC.J1.11
N$44
  Bottom 0.813: JP9.12 NUC.J1.12
N$45
  Bottom 0.813: JP9.13 NUC.J1.13
N$46
  Bottom 0.813: JP9.14 NUC.J1.14
N$48
  Bottom 0.813: JP9.15 NUC.J1.15
N$49
  Bottom 0.813: U$6.2 JP22.3 45.09,11.43 U$7.9
N$50  (1 unrouted)
N$51  (1 unrouted)
N$52  (1 unrouted)
N$53  (1 unrouted)
N$54
  Bottom 0.813: JP8.1 NUC.J2.1
N$56
  Bottom 0.813: JP8.3 NUC.J2.3
N$57
  Bottom 0.813: JP21.2 45.72,33.66 U$7.1
N$58
  Bottom 0.813: NUC.J2.5 JP8.5 95.25,83.82 111.76,100.33 118.11,100.33 120.65,102.87 120.65,107.95 121.92,109.22 123.19,109.22
N$59
  Bottom 0.813: NUC.J2.6 JP8.6 97.79,83.82
N$60
  Bottom 0.813: U$6.3 JP22.4
N$61
  Bottom 0.813: U$6.4 JP22.5 45.09,16.51 U$7.8
N$62
  Bottom 0.813: JP8.13 NUC.J2.13
N$63
  Bottom 0.813: JP8.14 NUC.J2.14 120.65,76.2 133.35,76.2 JP17.2
N$64  (1 unrouted)
  Bottom 0.813: JP8.15 NUC.J2.15
N$65  (1 unrouted)
N$66
  Bottom 0.813: U$6.5 JP22.6
N$67
  Bottom 0.813: U$6.+5V(OUT) JP22.7
N$68
  Bottom 0.813: U$6.6 JP22.8 45.09,24.13 U$7.5
N$69
  Bottom 0.813: JP22.9 U$6.7
N$70
  Bottom 0.813: R27.2 R22.1 20.32,129.54 Q1.1
N$72
  Bottom 0.813: JP22.11 U$6.9
N$73
  Bottom 0.813: U$6.10 JP22.12 39.37,34.29 45.72,27.94 U$7.3
N$74
  Bottom 0.813: JP22.13 U$6.11
N$75
  Bottom 0.813: JP10.1 M2.J1.15
N$76
  Bottom 0.813: M2.J1.14 JP10.2
N$77
  Bottom 0.813: JP10.3 M2.J1.13
N$78
  Bottom 0.813: M2.J1.12 JP10.4
N$79
  Bottom 0.813: JP10.5 M2.J1.11
N$80
  Bottom 0.813: M2.J1.10 JP10.6
N$81
  Bottom 0.813: JP10.7 M2.J1.9
N$82
  Bottom 0.813: M2.J1.8 JP10.8
N$83
  Bottom 0.813: JP10.9 M2.J1.7
N$84
  Bottom 0.813: U$6.VSRV JP22.14
N$85
  Bottom 0.813: JP10.12 M2.J1.4
N$86
  Bottom 0.813: M2.J1.3 JP10.13
N$87
  Bottom 0.813: JP10.14 M2.J1.2
N$88
  Bottom 0.813: M2.J1.1 JP10.15
N$89  (1 unrouted)
  Bottom 0.813: 97.79,91.44 JP11.15 M2.J2.15
N$90
  Bottom 0.813: JP11.14 M2.J2.14
N$91
  Bottom 0.813: JP11.13 M2.J2.13
N$93
  Bottom 0.813: JP11.3 M2.J2.3
N$95
  Bottom 0.813: D5.A 99.06,45.72 101.6,45.72 | 101.6,45.72 109.22,45.72 110.49,46.99 JP13.1 | 106.68,35.56 Q4.2 102.87,35.56 101.6,36.83 101.6,45.72
N$96
  Bottom 0.813: JP14.1 96.52,48.26 D6.A 91.44,36.83 92.71,35.56 Q5.2
N$97
  Bottom 0.813: R27.1 6.35,125.73 JP12.2
N$98
  Bottom 0.813: JP15.1 132.08,48.26 134.62,45.72 D7.A 132.08,40.64 128.27,40.64 127,39.37 127,36.83 128.27,35.56 Q6.2
N$99
  Bottom 0.813: Q7.2 114.3,35.56 113.03,36.83 113.03,45.72 JP16.1 120.65,43.18 D8.A
N$100
  Bottom 0.813: IC4.IN 6.35,66.04 C7.1 11.43,66.04 12.7,67.31 12.7,70.61 U$2.OUT+
N$101
  Bottom 0.813: OC_POW.1 34.29,77.47 R28.1
N$102
  Bottom 0.813: Q1.2 22.86,132.08 24.13,130.81 24.13,125.73 | 24.13,125.73 24.38,125.48 U$1.IN+ | 24.13,125.73 21.34,122.94 U$2.IN+
N$104
  Bottom 0.813: LED5.A R29.1
N$106  (1 unrouted)
N$107  (1 unrouted)
NA0  (1 unrouted)
  Bottom 0.813: R17.2 R13.1 | NUC.J2.12 JP8.12
NA1  (1 unrouted)
  Bottom 0.813: R16.2 R12.1 | NUC.J2.11 JP8.11 110.49,93.98 113.03,96.52
NA2
  Bottom 0.813: R11.1 R15.2 123.19,106.68 121.92,105.41 121.92,101.6 119.38,99.06 113.03,99.06 107.95,93.98 JP8.10 NUC.J2.10
NA3  (1 unrouted)
  Bottom 0.813: R10.1 R14.2 123.19,102.87 123.19,100.33 120.65,97.79 114.3,97.79 | JP8.9 NUC.J2.9
TMP1
  Bottom 0.813: M2.J2.8 JP11.8 97.79,109.22 113.03,124.46 JP24.1
TMP2
  Bottom 0.813: M2.J2.7 JP11.7 97.79,111.76 109.22,123.19 JP5.1
TMP3
  Bottom 0.813: M2.J2.6 JP11.6 97.79,114.3 105.41,121.92 JP4.1
TMP4
  Bottom 0.813: M2.J2.5 JP11.5 97.79,116.84 101.6,120.65 JP3.1
TP1
  Bottom 0.813: JP6.5 R23.2 107.95,33.02 Q4.1
TP2
  Bottom 0.813: Q5.1 96.52,33.02 R24.2 102.87,26.67 JP6.7
VCCE  (7 unrouted)
  Bottom 0.813: IC3.OUT 62.23,78.74 | 62.23,78.74 R20.2 | C8.1 62.23,78.74 | M2.J2.4 JP11.4 97.74,120.6 97.83,120.6 99.06,121.83 99.06,132.08 100.33,133.35 JP3.2 JP4.2 JP5.2 JP24.2
VCCN  (2 unrouted)
  Bottom 0.813: R28.2 26.67,81.28 22.86,85.09 19.05,85.09 10.16,76.2 C6.1 6.35,73.66 IC4.OUT 3.81,72.39 2.54,71.12 2.54,62.23 JP19.1 | JP19.1 JP19.3 JP19.5 JP19.7 JP19.9 3.81,45.72 5.08,44.45 D2.A | JP19.1 6.35,63.5 10.16,63.5 R29.2 | R33.1 R34.1
(copper drawn outside any net)
  shapes: Bottom area x1